# Altium PCB 电源2.0.PcbDoc
Units mil, origin at the board's own origin, x right, y up, seen from the top; angles counter-clockwise.
Board outline 3940.03 x 3730.03 mil, 2 copper layers (Top Layer, Bottom Layer); 17 components, 7 nets, 38 pads, 0 vias.
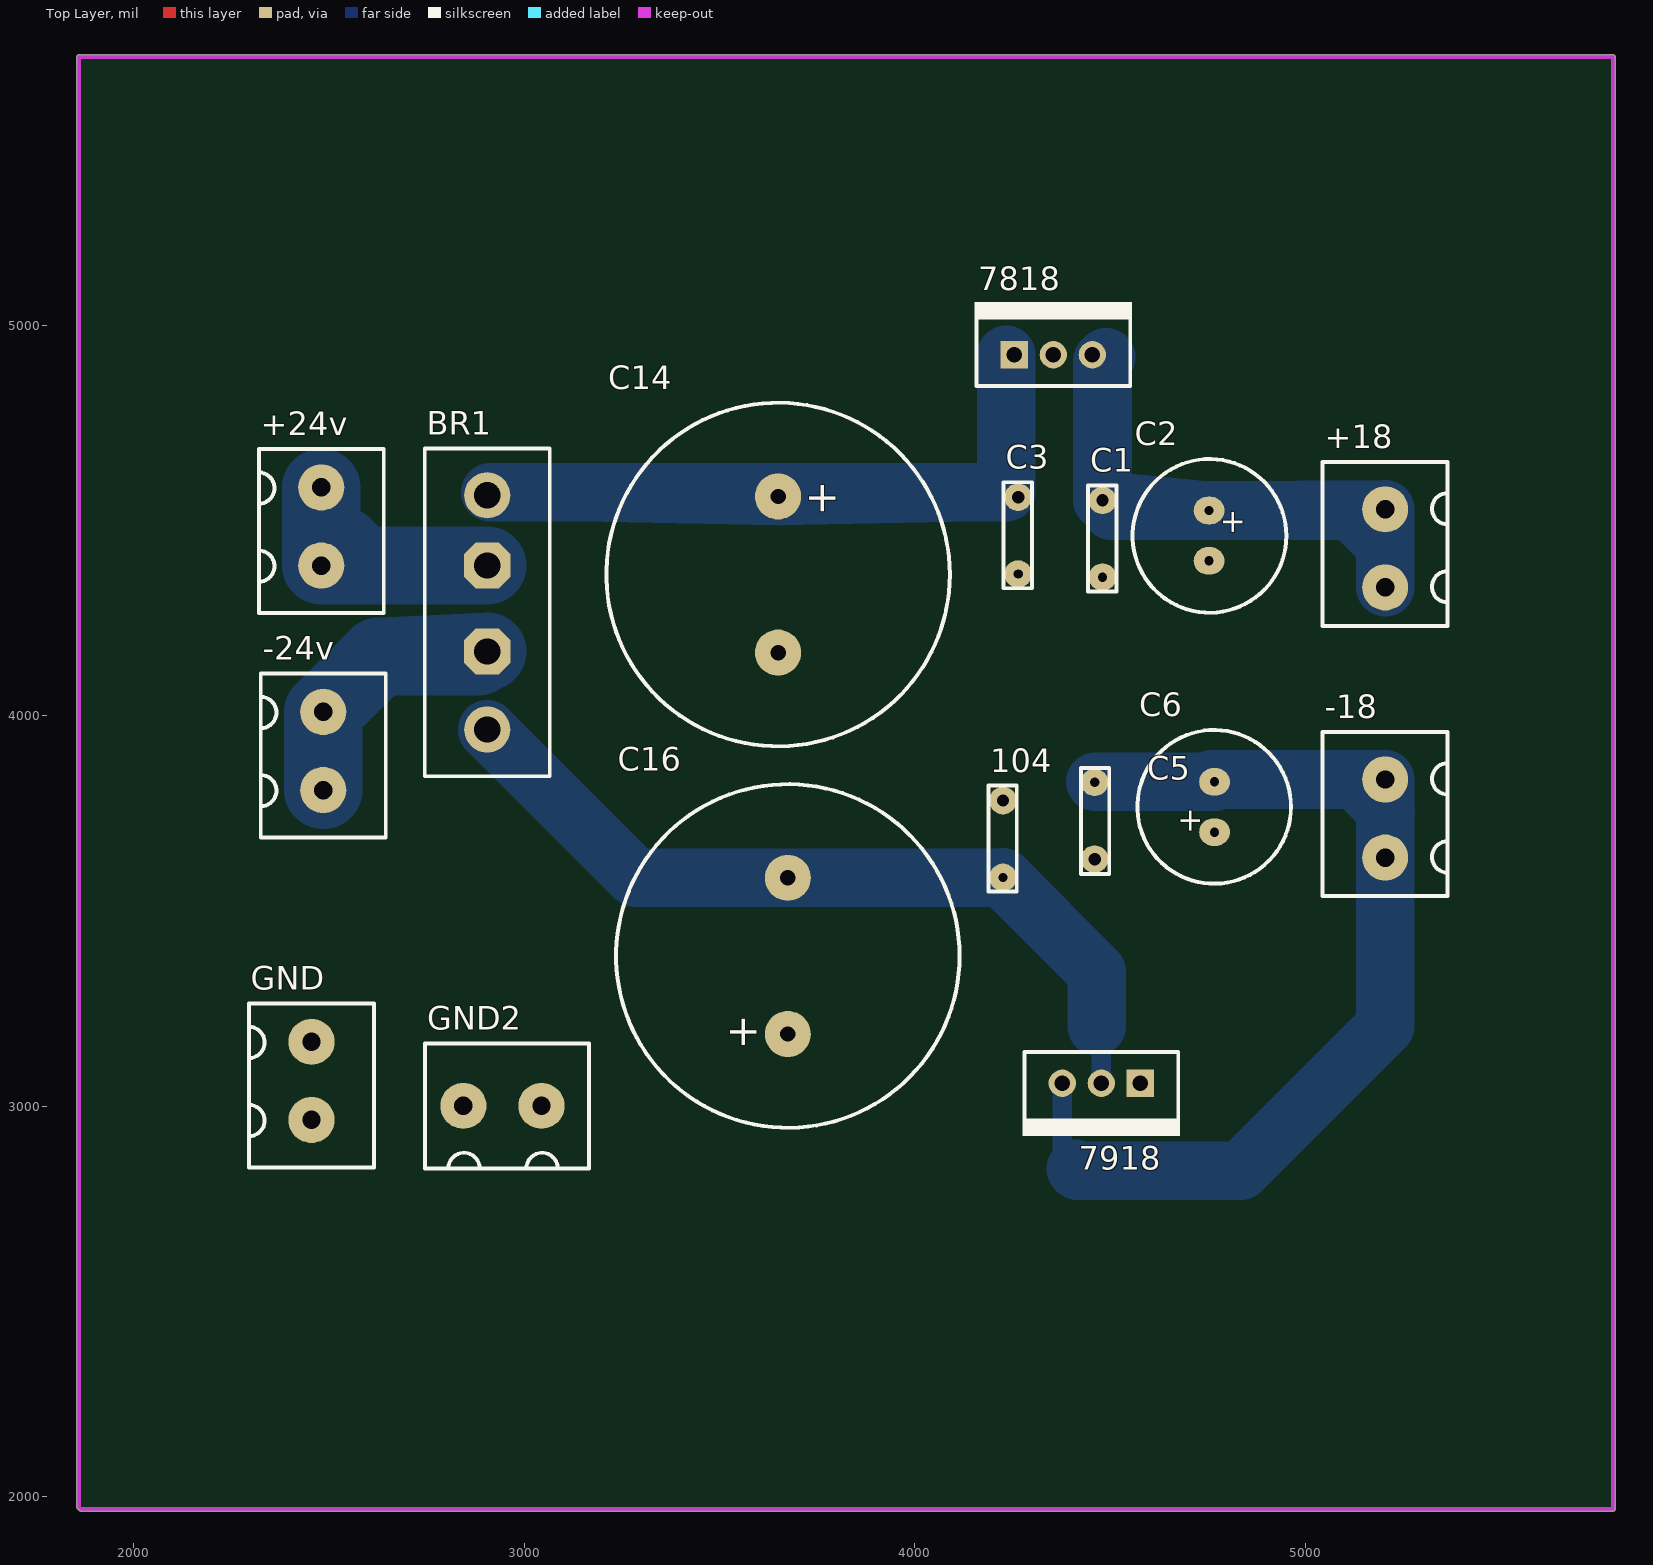
[diagram p0: Top Layer view]
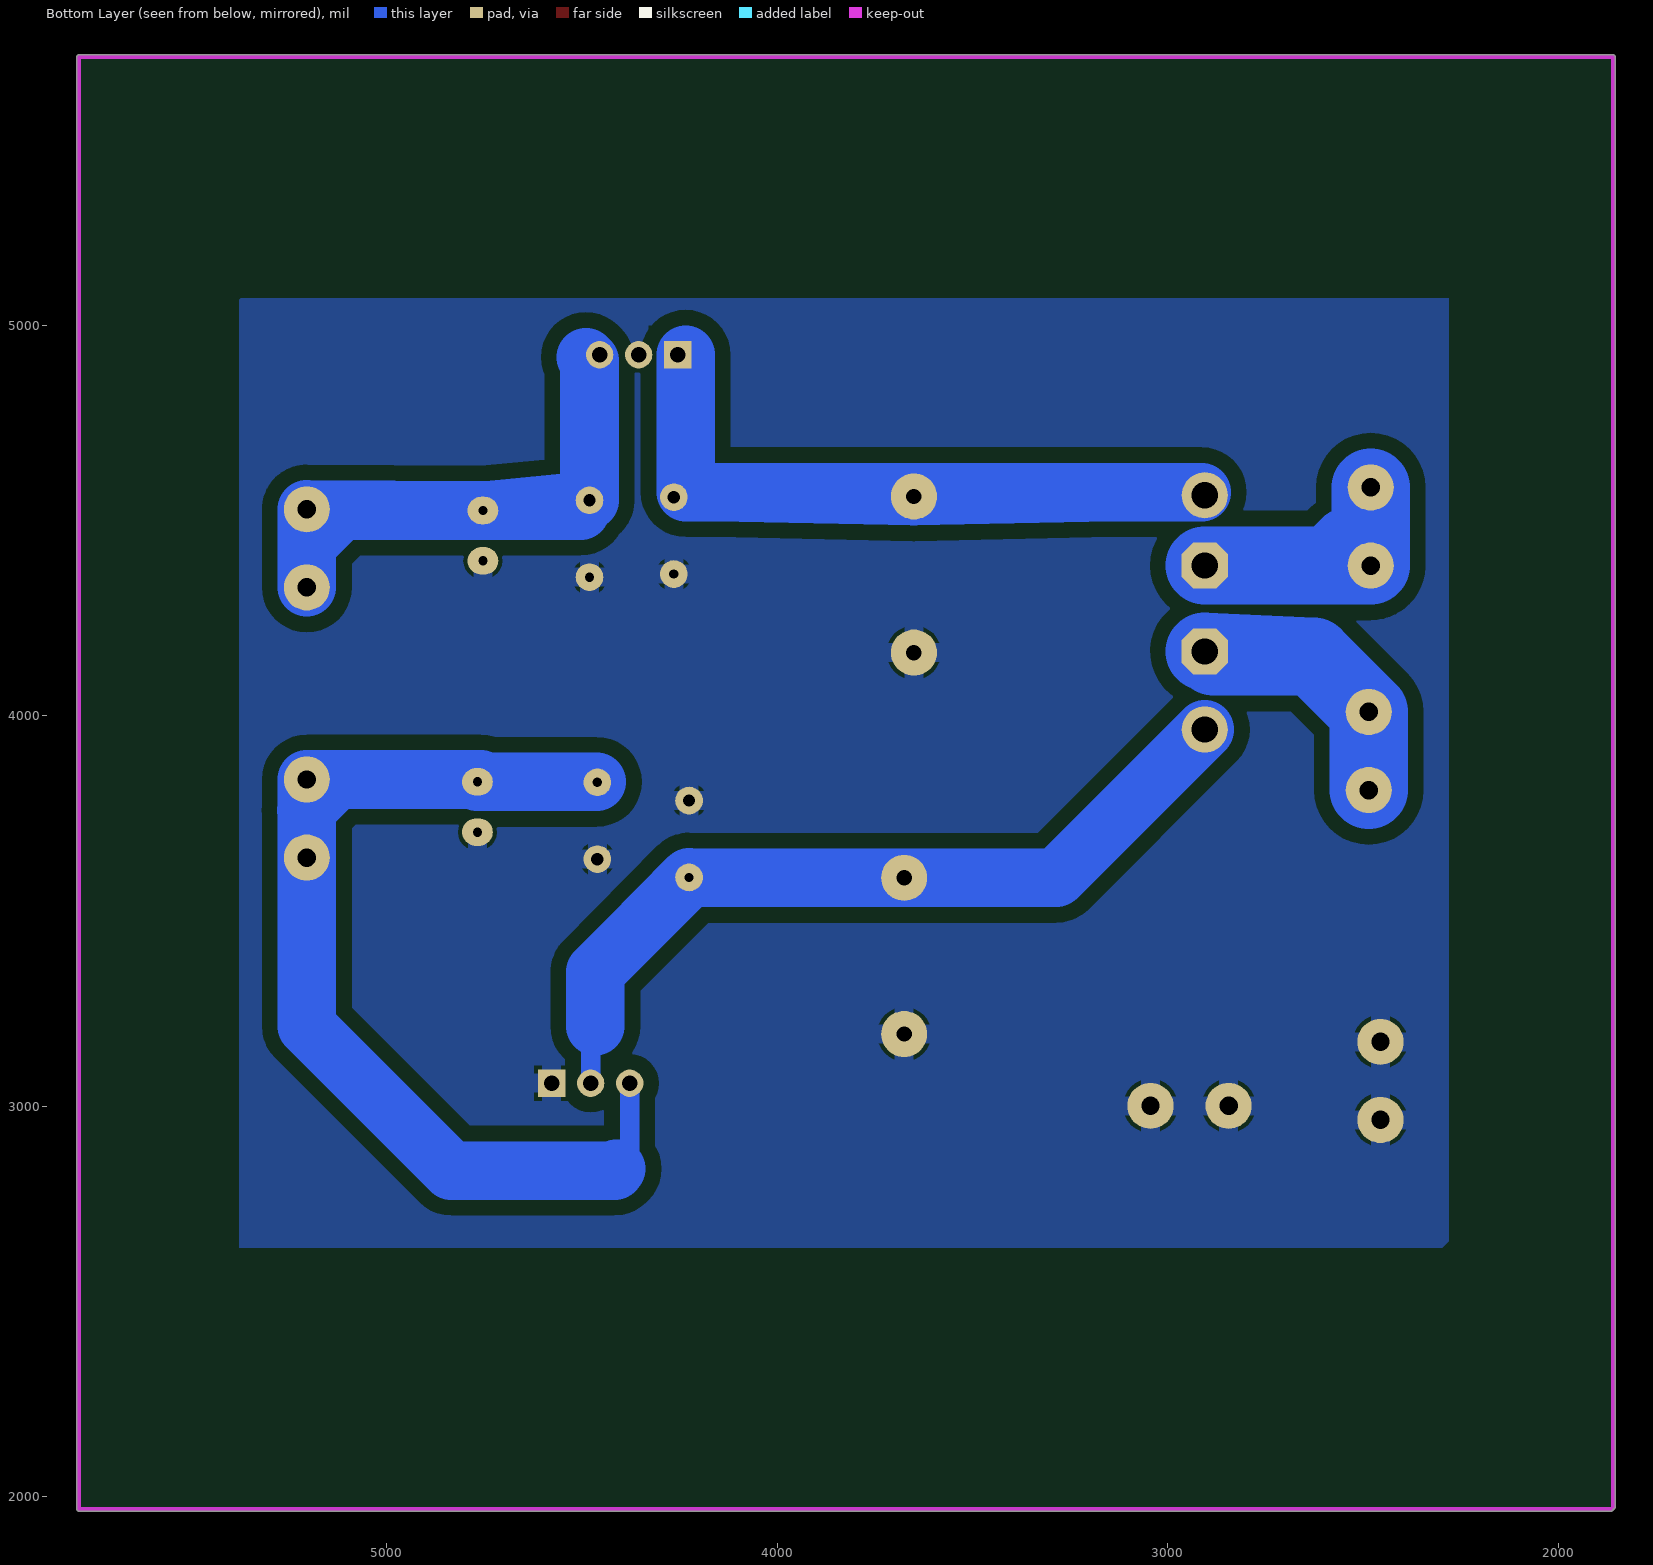
[diagram p1: Bottom Layer view, seen from below]

## Layer stack, top to bottom
Top Layer: signal copper 1.4
Dielectric: dielectric 12.6, FR-4, Dk 4.8
Bottom Layer: signal copper 1.4

## Board outline
1858.98,1967.98 cw(c1859,1973) 1853.98,1973 1853.98,5688 cw(c1859,5688) 1859,5693.02 5789,5693.02 cw(c5789,5688) 5794.02,5688 5794.02,1968 cw(c5789,1968) 5789,1962.98 1864,1962.98 cw(c1864,1968)

## Design rules (kind name [scope] priority, off if disabled: settings)
Clearance [All] p1: gap=10
PolygonConnect [All] p1: connectstyle=Relief reliefconductorwidth=50 reliefentries=4 polygonreliefangle="90 Angle" airgapwidth=10
RoutingVias [All] p1: holewidth=28 width=50 viastyle="Through Hole" minholewidth=28 minwidth=50 maxholewidth=28 maxwidth=50
SolderMaskExpansion [All] p1: expansion=4
Width [All] p1: maxlimit=240 minlimit=10 preferedwidth=150 toplayer_maxwidth=10 toplayer_prefwidth=10 bottomlayer_minwidth=20 minimp=50.000000 maximp=50.000000 favimp=50.000000
28 further rules are at their usual default settings.

## Components (designator, comment, footprint, x,y, rotation, side; value= is the part's Value field where it differs from the comment)
104 "104" CAP2 4226,3783 r270 top
7818 "7805" TO-220 4255,4925 r0 top
7918 "7905" TO-220 4578,3059 r180 top
+18 "CON2" 2P-200 5205,4529 r270 top
+24v "CON2" 2P-200 2480,4385 r90 top
-18 "CON2" 2P-200 5205,3837 r270 top
-24v "CON2" 2P-200 2485,3810 r90 top
BR1 "BRIDGE1" D3 2905,4265 r90 top
C1 "104" CAP2 4481,4552 r270 top
C2 "407UF" CAO5 4755,4525 r270 top
C3 "104" CAP2 4265,4560 r270 top
C5 "104" CAP2 4461,3633 r90 top
C6 "470UF" CAO5 4767,3703 r90 top
C14 "4700UF" C22 3650,4362 r270 top
C16 "4700UF" C22 3675,3385 r90 top
GND "CON2" 2P-200 2455,2965 r90 top
GND2 "CON2" 2P-200 3044,3001 r180 top

## Footprints (in the part's own frame and the unit in brackets; to place one, negate y for a bottom-side part, rotate by r counter-clockwise, add the part's x,y. Pads: shape width x height; smd on the part's side, far side on the other; paste and mask are expansions set on the pad)
2P-200 [mm]
  round 3 hole 1.2: 1(0,0) 2(5.08,0)
  silkscreen extent -3.09,-4.06 7.58,4.06
C22 [mm]
  round 3 hole 1: 1(-5.08,0) 2(5.08,0)
  silkscreen extent -11.18,-11.17 11.18,11.18
CAO5 [mm]
  oval 1.8x2 hole 0.6: 1(-0.025,-0.025) 2(3.25,-0.025)
  silkscreen extent -3.37,-5 6.62,5
CAP2 [mm]
  round 1.8 hole 0.8: 1(0,0)
  round 1.8 hole 0.6: 2(5,0)
  silkscreen extent -0.98,-0.95 5.93,0.9
D3 [mm]
  oct 3x3 hole 1.7: 1(3.048,0) 2(-2.54,0)
  round 3 hole 1.7: 3(-7.62,0) 4(7.62,0)
  silkscreen extent -10.67,-4.06 10.67,4.06
TO-220 [mil]
  rect 70x70 hole 40: 1(0,0)
  round 70 hole 40: 2(100,0) 3(200,0)
  silkscreen extent -102,-80 302,135

## Part data
104 C1 C3 C5: library part CAP1
+18 +24v -18 -24v GND GND2: "Connector"
BR1: "BR"
C2 C6 C14 C16: library part CAP3

## Nets (pads, with @x,y where several pads share a name; then routed paths per layer and width w, separated by ;. In a path a pad name is that pad's centre, name@x,y a point inside that pad or via, vN(x,y) a via of type N, cw(c..) or ccw(c..) an arc to the next point about the centre after c; other vN are vias at no path point)
+18: 7818.3 +18.1 +18.2 C1.1 C2.1 | length 3698.2
  Bottom Layer w150: 4490,4919 4481,4910 C1.1 ; 5127,4515 5194,4448 ; C1.1 4750.08,4525.98 4503,4525.98 C2.1 ; C1.1 C2.1 ; C2.1 +18.1 ; C2.1 5201.98,4525.98 4757.95,4525.98 +18.1 ; +18.1 +18.2 +18.1
+24: 7818.1 BR1.4 C3.1 C14.1 | length 2694
  Bottom Layer w150: BR1.4@2913,4573 4235,4573 7818.1@4235,4925 ; 3140.08,4573 C14.1 4159.88,4573
-18: 7918.3 -18.1 -18.2 C5.2 C6.2 | length 2850.9
  Bottom Layer w50: 4412,2840 4378,2874 ; 4378,2874 7918.3 4378,2874
  Bottom Layer w150: 4412,2840 4417,2835 4835,2835 5205,3205 -18.2 -18.1@5205,3834 ; C5.2@4462.1,3830.95 C6.2 ; C6.2@4760.06,3837 -18.1 ; 5132,3832 5206,3758
-24: 104.2 7918.2 BR1.3 C16.2 | length 3826.3
  Bottom Layer w50: 7918.2 4478,3193
  Bottom Layer w150: BR1.3 3282.25,3587.75 ; BR1.3@2915.5,3954.5 3285,3585 ; 3740.55,3585 104.2 4466,3343.85 ; 4466,3205 4466,3343.85 ; 3285,3585 C16.2 ; 3285,3585 C16.2 ; C16.2 4224.85,3585 4466,3343.85
GND: 104.1 7818.2 7918.1 C1.2 C2.2 C3.2 C5.1 C6.1 C14.2 C16.1 GND2.1 GND2.2 GND.1 GND.2
Net+24v_1: +24v.1 +24v.2 BR1.1 | length 1379.7
  Bottom Layer w200: 2535,4435 2565,4405 +24v.1 ; +24v.1 +24v.2 +24v.1 ; +24v.1 BR1.1 +24v.1
Net-24v_1: -24v.1 -24v.2 BR1.2 | length 1134.2
  Bottom Layer w200: BR1.2@2882.05,4152 2627,4152 ; BR1.2 2627,4152 ; -24v.2 -24v.1 -24v.2 ; -24v.2 2627,4152

## Polygon pours and split planes (outlines as drawn)
GND on Bottom Layer "GND" (solid, remove dead copper, pour order 6): 2280,5070 5374,5070 5378,5066 5378,2637 2297,2637 2280,2654

## Keep-outs
Keep-Out Layer:
  lines w10: 1859,1973 1859,5688 5789,5688 5789,1968 1864,1968

## Text inside footprints (layer, text, board x,y; h text height)
C2: Top Overlay "+" at 4790.43,4530.91 h60 r270
C6: Top Overlay "+" at 4731.57,3697.09 h60 r90
C14: Top Overlay "+" at 3730,4602 h78.74 r270
C16: Top Overlay "+" at 3595,3145 h78.74 r90